# Altium PCB PCB1.PcbDoc (part 1 of 2)
Units mm, origin at the board's own origin, x right, y up, seen from the top; angles counter-clockwise.
Board outline 152.4 x 101.6 mm, 4 copper layers (Top Layer, Int1 (GND), Int2 (PWR), Bottom Layer), stack 7.251 mm thick; 107 components, 80 nets, 514 pads, 20 vias.
Unrouted connection lines stored in the file: 263.
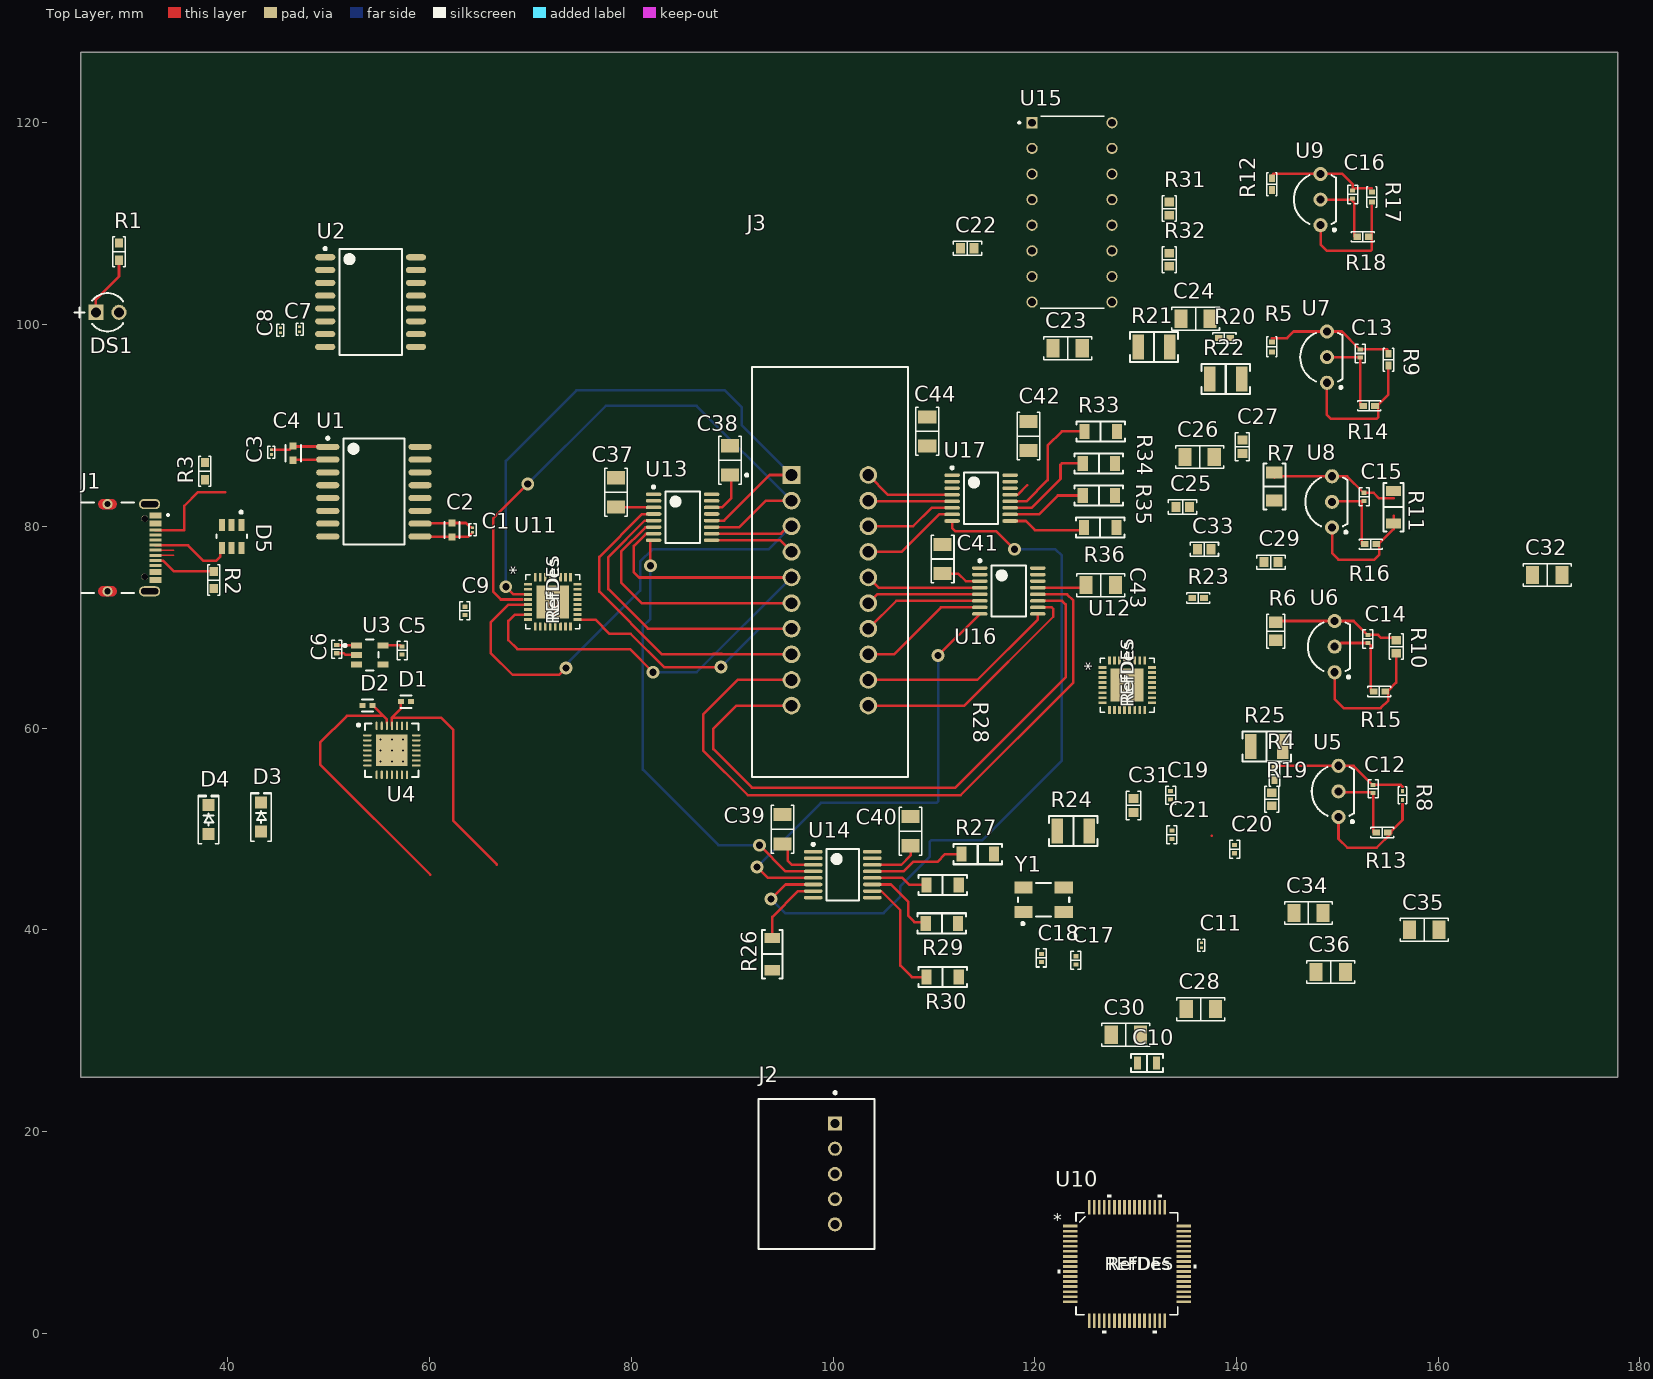
[diagram p0: Top Layer view]
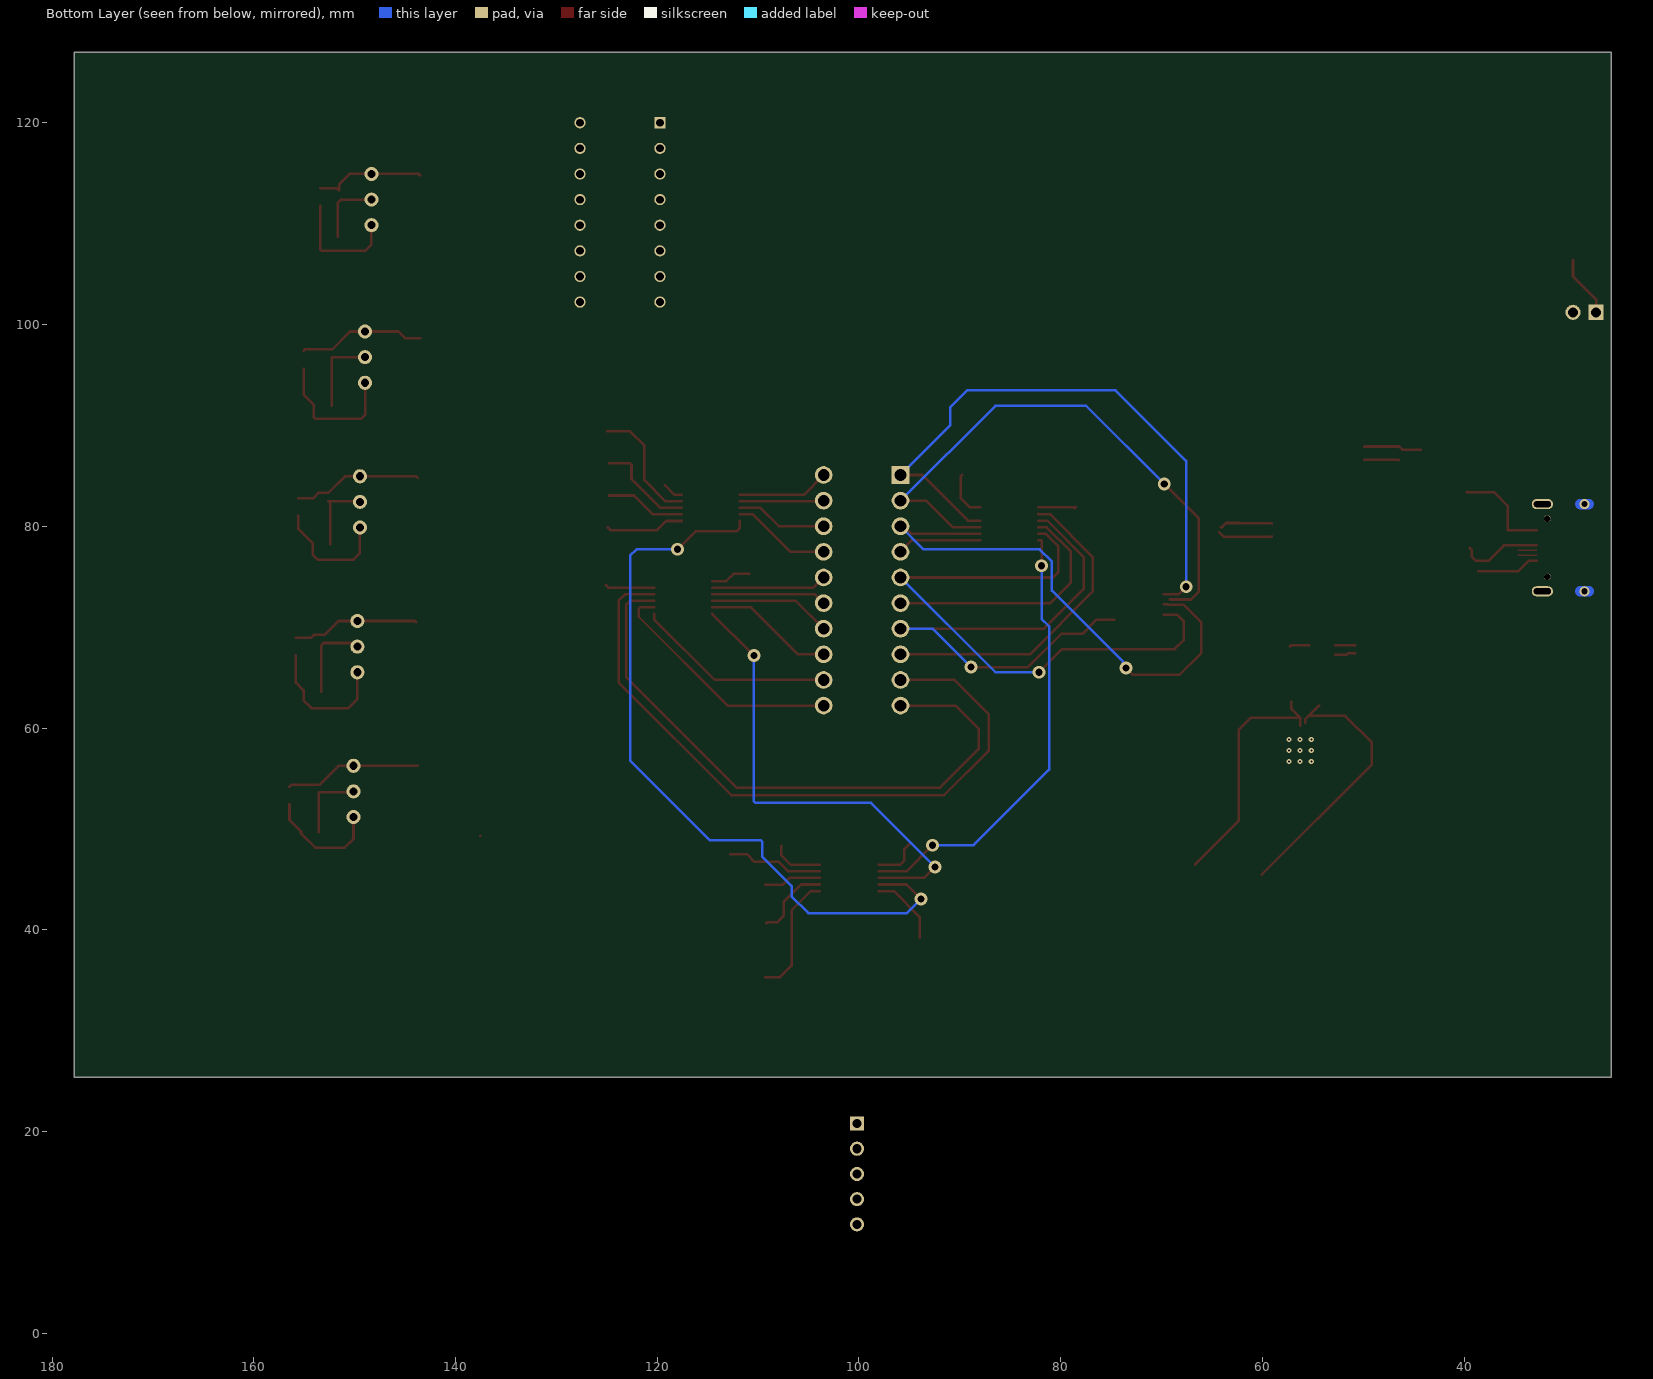
[diagram p1: Bottom Layer view, seen from below]
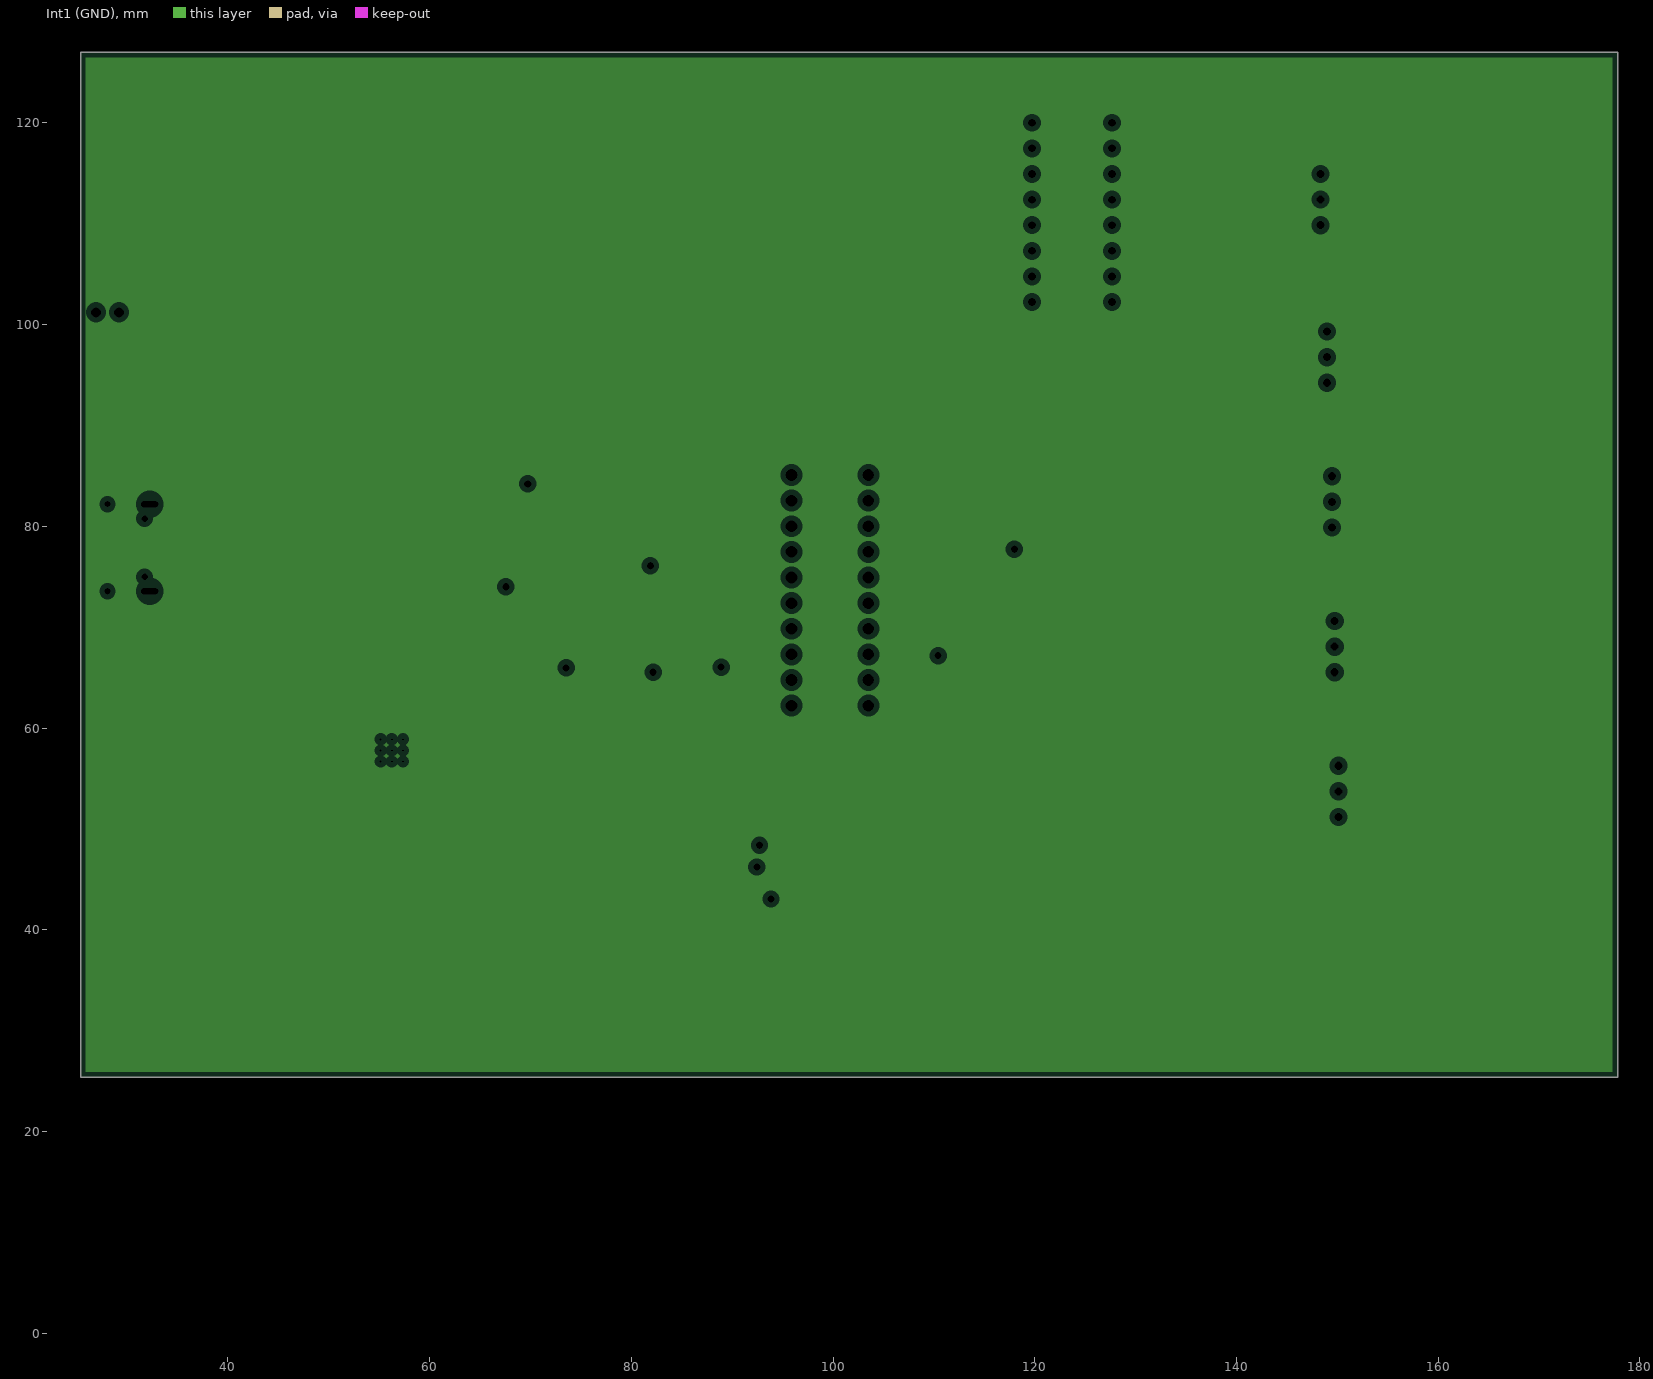
[diagram p2: Int1 (GND), clearances drawn from the general rule]
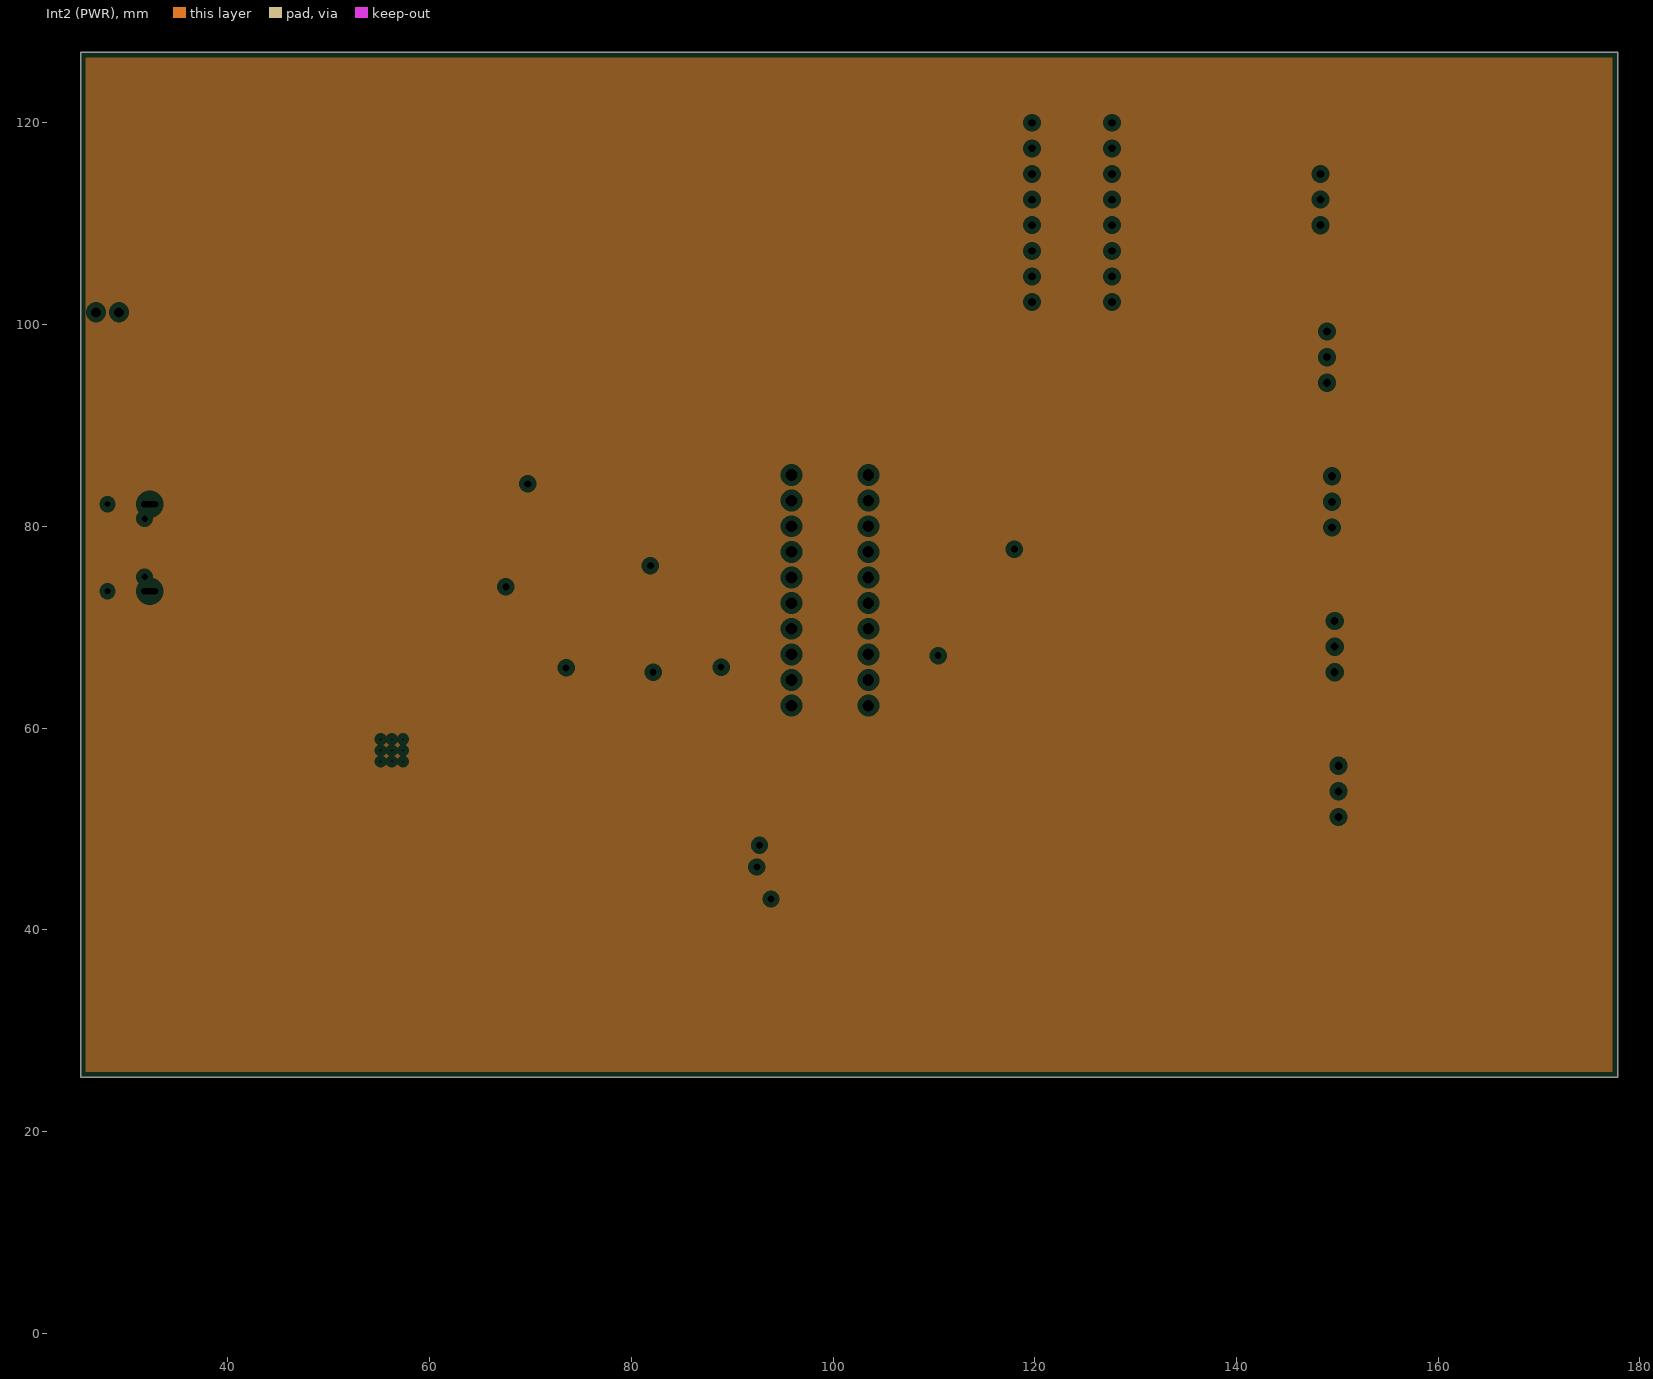
[diagram p3: Int2 (PWR), clearances drawn from the general rule]

## Layer stack, top to bottom
Top Solder: solder mask 0.0254, SM-001, Dk 4
Top Layer: signal copper 0.035
Dielectric 1: prepreg 1.6, PP-017, Dk 4.6
Dielectric 2: prepreg 1.6, PP-017, Dk 4.6
Int1 (GND): plane copper 0.035
Dielectric 3: core 0.7112, Core-039, Dk 4.8
Int2 (PWR): plane copper 0.035
Dielectric 4: prepreg 1.6, PP-017, Dk 4.6
Dielectric 5: prepreg 1.6, PP-017, Dk 4.6
Bottom Layer: signal copper 0.035
Bottom Solder: solder mask 0.0254, SM-001, Dk 4

## Board outline
25.4,25.4 177.8,25.4 177.8,127 25.4,127

## Design rules (kind name [scope] priority, off if disabled: settings)
Clearance [All] p1: gap=0.25 ignorepadtopadclearanceinfootprint=FALSE except(0: Arc-Hole Track-Hole SMDPad-Hole THPad-Hole Via-Hole Fill-Hole Poly-Hole Region-Hole Text-Hole; 0.15: Arc-Arc Arc-Track Arc-SMDPad Track-Track Track-SMDPad SMDPad-SMDPad; 0.3: Arc-THPad Track-THPad SMDPad-THPad THPad-THPad)
PlaneClearance [All] p1: clearance=0.508
PlaneConnect [All] p1: planeconnectstyle=Relief reliefexpansion=0.508 reliefentries=4 reliefconductorwidth=0.254 reliefairgap=0.254
PolygonConnect [All] p1: thpad.connectstyle=Relief thpad.reliefconductorwidth=0.254 thpad.reliefentries=4 thpad.polygonreliefangle="90 Angle" thpad.airgapwidth=0.254 smdpad.connectstyle=Relief smdpad.reliefconductorwidth=0.254 smdpad.reliefentries=4 smdpad.polygonreliefangle="90 Angle" smdpad.airgapwidth=0.254 via.connectstyle=Direct via.reliefconductorwidth=0.254 via.reliefentries=4 via.polygonreliefangle="90 Angle" via.airgapwidth=0.254
RoutingVias [All] p1: holewidth=0.3 width=0.7 viastyle="Through Hole" minholewidth=0.25 minwidth=0.6 maxholewidth=0.3 maxwidth=0.7
SolderMaskExpansion [All] p1: expansion=0.102 istentingtop=FALSE
SupplyNets "Schematic Supply Nets_2" [InNet('2Y5')] p1: voltage=0.000
SupplyNets "Schematic Supply Nets_5" [InNet('REFN')] p2: voltage=0.000
SupplyNets "Schematic Supply Nets_4" [InNet('VBUS')] p3: voltage=0.000
SupplyNets "Schematic Supply Nets_3" [InNet('VDD')] p4: voltage=0.000
SupplyNets "Schematic Supply Nets_1" [InNet('USBGND')] p5: voltage=0.000
UnRoutedNet [All] p1: checkbadconnections=TRUE
Width [All] p1: maxlimit=1 minlimit=0.15 preferedwidth=0.3
27 further rules are at their usual default settings.

## Classes and differential pairs
component class USB_to_UART: C1 C2 C3 C4 C5 C6 C7 C8 C9 C10 C11 D1 D2 D3 D4 D5 DS1 J1 R1 R2 R3 U1 U2 U3 U4
component class STM32: C12 C13 C14 C15 C16 C17 C18 C19 C20 C21 J2 R4 R5 R6 R7 R8 R9 R10 R11 R12 R13 R14 R15 R16 R17 R18 R19 U5 U6 U7 U8 U9 U10 Y1
component class Muxes_and_ADC: C34 C35 C36 C37 C38 C39 C40 C41 C42 C43 C44 R26 R27 R28 R29 R30 R31 R32 R33 R34 R35 R36 U13 U14 U15 U16 U17
component class "Analog_Switch_Array_and_ZIF_ socket": C22 C23 C24 C25 C26 C27 C28 C29 C30 C31 C32 C33 J3 R20 R21 R22 R23 R24 R25 U11 U12

## Components (designator, comment, footprint, x,y, rotation, side; value= is the part's Value field where it differs from the comment)
C1 "GRM033R61A104ME15D" "MURATA GRM033 0201_0603" 64.262,79.645 r90 top value=100nF
C2 "10uF" FP-C1608-080-0_1-MFG 62.23,79.629 r90 top
C3 "GRM033R61A104ME15D" "MURATA GRM033 0201_0603" 44.323,87.36 r90 top value=100nF
C4 "10uF" FP-C1608-080-0_1-MFG 46.482,87.249 r90 top
C5 "GRM155C81C105ME11J" "MURATA GRM155 0402_1005" 57.277,67.691 r90 top value=2.2µF
C6 "GRM155C81C105ME11J" "MURATA GRM155 0402_1005" 50.8,67.818 r90 top value=2.2µF
C7 "GRM033R61A104ME15D" "MURATA GRM033 0201_0603" 47.117,99.552 r90 top value=100nF
C8 "GRM033R61A104ME15D" "MURATA GRM033 0201_0603" 45.212,99.441 r90 top value=100nF
C9 "GRM155C81C105ME11J" "MURATA GRM155 0402_1005" 63.5,71.628 r90 top value=10nF
C10 "GRM21BR71A475KE51L" "MURATA GRM21B 0805_2012" 131.125,26.797 r0 top value=4.7µF
C11 "GRM033R61A104ME15D" "MURATA GRM033 0201_0603" 136.525,38.465 r90 top value=100nF
C12 "GRM155R71H104KE14D" "MURATA GRM155 0402_1005" 153.543,53.975 r90 top value=0.1uF
C13 "GRM155R71H104KE14D" "MURATA GRM155 0402_1005" 152.273,97.136 r90 top value=0.1uF
C14 "GRM155R71H104KE14D" "MURATA GRM155 0402_1005" 153.035,68.834 r90 top value=0.1uF
C15 "GRM155R71H104KE14D" "MURATA GRM155 0402_1005" 152.654,82.931 r90 top value=0.1uF
C16 "GRM155R71H104KE14D" "MURATA GRM155 0402_1005" 151.511,112.903 r90 top value=0.1uF
C17 "GRM155R71H104KE14D" "MURATA GRM155 0402_1005" 124.079,36.976 r90 top value=15pF
C18 "GRM155R71H104KE14D" "MURATA GRM155 0402_1005" 120.65,37.211 r90 top value=15pF
C19 "GRM155R71H104KE14D" "MURATA GRM155 0402_1005" 133.477,53.34 r90 top value=100nF
C20 "GRM155R71H104KE14D" "MURATA GRM155 0402_1005" 139.827,47.987 r90 top value=100nF
C21 "GRM155R71H104KE14D" "MURATA GRM155 0402_1005" 133.604,49.422 r90 top value=100nF
C22 "KGM15CR51A106MM" "CAP 0603_1608" 113.324,107.569 r180 top value=10µF
C23 "C1206X104G4HAC7800" "CAP 1206_3216 - 0.8MM" 123.264,97.663 r0 top value=100nF
C24 "C1206X104G4HAC7800" "CAP 1206_3216 - 0.8MM" 135.943,100.584 r0 top value=100nF
C25 "KGM15CR51A106MM" "CAP 0603_1608" 134.66,81.915 r0 top value=10µF
C26 "C1206X104G4HAC7800" "CAP 1206_3216 - 0.8MM" 136.345,86.868 r0 top value=100nF
C27 "KGM15CR51A106MM" "CAP 0603_1608" 140.589,87.884 r90 top value=10µF
C28 "C1206X104G4HAC7800" "CAP 1206_3216 - 0.8MM" 136.472,32.131 r0 top value=100nF
C29 "KGM15CR51A106MM" "CAP 0603_1608" 143.423,76.454 r180 top value=10µF
C30 "C1206X104G4HAC7800" "CAP 1206_3216 - 0.8MM" 129.032,29.591 r0 top value=100nF
C31 "KGM15CR51A106MM" "CAP 0603_1608" 129.794,52.324 r90 top value=10µF
C32 "C1206X104G4HAC7800" "CAP 1206_3216 - 0.8MM" 170.815,75.184 r0 top value=100nF
C33 "KGM15CR51A106MM" "CAP 0603_1608" 136.819,77.724 r180 top value=10µF
C34 "C1206X104G4HAC7800" "CAP 1206_3216 - 0.8MM" 147.14,41.656 r0 top value=100nF
C35 "C1206X104G4HAC7800" "CAP 1206_3216 - 0.8MM" 158.623,40.005 r0 top value=1uF
C36 "C1206X104G4HAC7800" "CAP 1206_3216 - 0.8MM" 149.352,35.814 r0 top value=100nF
C37 "C1206X104G4HAC7800" "CAP 1206_3216 - 0.8MM" 78.486,83.365 r270 top value=100nF
C38 "C1206X104G4HAC7800" "CAP 1206_3216 - 0.8MM" 89.789,86.54 r90 top value=100nF
C39 "C1206X104G4HAC7800" "CAP 1206_3216 - 0.8MM" 94.996,49.964 r270 top value=100nF
C40 "C1206X104G4HAC7800" "CAP 1206_3216 - 0.8MM" 107.696,49.784 r90 top value=100nF
C41 "C1206X104G4HAC7800" "CAP 1206_3216 - 0.8MM" 110.871,76.761 r270 top value=100nF
C42 "C1206X104G4HAC7800" "CAP 1206_3216 - 0.8MM" 119.38,88.953 r90 top value=100nF
C43 "C1206X104G4HAC7800" "CAP 1206_3216 - 0.8MM" 126.545,74.168 r0 top value=100nF
C44 "C1206X104G4HAC7800" "CAP 1206_3216 - 0.8MM" 109.347,89.408 r90 top value=100nF
D1 "TPD1E10B06DPYR" FP-DPY0002A-MFG 57.65,62.611 r180 top
D2 "TPD1E10B06DPYR" FP-DPY0002A-MFG 53.856,62.23 r0 top
D3 "SMF5.0A" SOD123F 43.307,51.181 r90 top
D4 "SMF5.0A" SOD123F 38.1,50.927 r90 top
D5 "USBLC6-4SC6" FP-SOT23-6L-MFG 40.386,79.001 r270 top value=3pF
DS1 "304090040" LED-2P-2.28-3MM 28.067,101.219 r0 top
J1 "USB4105GFA060" GCT_USB4105GFA060 28.07,77.882 r270 top
J2 "S5B-XH-A-1(LF)(SN)" FP-S5B-XH-A-1_LF_SN-MFG 98.353,15.795 r90 top
J3 "220-3342-00-0602J" FP-220-3342-00-0602J-0 99.695,75.45 r90 top
R1 "RC0603JR-105K1L" "YAGEO RES 0603_1608" 29.21,107.227 r90 top value="1 kOhms"
R2 "RC0603JR-105K1L" "YAGEO RES 0603_1608" 38.608,74.676 r90 top value="5.1 kOhms"
R3 "RC0603JR-105K1L" "YAGEO RES 0603_1608" 37.719,85.471 r270 top value="5.1 kOhms"
R4 "CRCW04022K49FKEDC" "RES 0402_1005" 143.764,55.386 r90 top value="2.49 kOhms"
R5 "RC0402FR-07442RL" "YAGEO RES 0402_1005" 143.51,97.79 r90 top value="442 Ohms"
R6 "RMEF0805FT200R" "RES 0805_2012" 143.891,69.596 r90 top value="920 Ohms"
R7 "RQ73C2B1K69BTD" "RES 1206_3216" 143.764,83.947 r90 top
R8 "RN73R1ETTP4171F50" "KOA RES RK73 RN73 0402_1005" 156.464,53.326 r90 top value="4.17 kOhms"
R9 "TNPW04025K56BEED" "RES 0402_1005" 155.067,96.52 r90 top value="5.56 kOhms"
R10 "RNCF0603BTE6K57" "RES 0603_1608" 155.829,68.072 r90 top value="6.57 kOhms"
R11 "RT1206BRD072K55L" "YAGEO RES 1206_3216" 155.575,81.901 r90 top
R12 "CRCW04022K49FKEDC" "RES 0402_1005" 143.51,113.919 r90 top value="2.49 kOhms"
R13 "CRCW04022K49FKEDC" "RES 0402_1005" 154.446,49.657 r0 top value="2.49 kOhms"
R14 "CRCW04022K49FKEDC" "RES 0402_1005" 153.162,91.948 r0 top value="2.49 kOhms"
R15 "CRCW04022K49FKEDC" "RES 0402_1005" 154.178,63.627 r0 top value="2.49 kOhms"
R16 "CRCW04022K49FKEDC" "RES 0402_1005" 153.303,78.232 r0 top value="2.49 kOhms"
R17 "AF0402FR-071K13L" "YAGEO RES 0402_1005" 153.416,112.649 r90 top value="1.13 kOhms"
R18 "CRCW04022K49FKEDC" "RES 0402_1005" 152.541,108.712 r0 top value="2.49 kOhms"
R19 "PNM0603E5001BST5" "RES 0603_1608" 143.51,52.944 r90 top value="5 kOhms"
R20 "RP73PF1E10KBTDF" "RES 0402_1005" 138.811,98.679 r180 top value="10 kOhms"
R21 "SG732ETTD222K" "RES 1210_3225" 131.826,97.79 r0 top
R22 "SG732ETTD222K" "RES 1210_3225" 138.938,94.615 r0 top
R23 "RP73PF1E10KBTDF" "RES 0402_1005" 136.204,72.898 r180 top value="10 kOhms"
R24 "SG732ETTD222K" "RES 1210_3225" 123.825,49.784 r0 top
R25 "SG732ETTD222K" "RES 1210_3225" 143.002,58.166 r0 top
R26 "RC1206FR-0747KP" "YAGEO RES 1206_3216" 93.98,37.592 r90 top
R27 "RC1206FR-0747KP" "YAGEO RES 1206_3216" 114.351,47.498 r180 top
R28 "RC1206FR-0747KP" "YAGEO RES 1206_3216" 110.871,44.45 r180 top
R29 "RC1206FR-0747KP" "YAGEO RES 1206_3216" 110.795,40.64 r180 top
R30 "RC1206FR-0747KP" "YAGEO RES 1206_3216" 110.871,35.306 r180 top
R31 "KTR03EZPF4701" "RES 0603_1608" 133.35,111.506 r90 top value="4.7 kOhms"
R32 "KTR03EZPF4701" "RES 0603_1608" 133.35,106.426 r90 top value="4.7 kOhms"
R33 "RC1206FR-0747KP" "YAGEO RES 1206_3216" 126.543,89.408 r180 top
R34 "RC1206FR-0747KP" "YAGEO RES 1206_3216" 126.365,86.233 r180 top
R35 "RC1206FR-0747KP" "YAGEO RES 1206_3216" 126.365,83.058 r180 top
R36 "RC1206FR-0747KP" "YAGEO RES 1206_3216" 126.492,79.883 r180 top
U1 "ADUM5000ARWZ" ADI-RW-16_N 54.483,83.439 r0 top
U2 "ADUM4160BRWZ" RW-16_L 54.157,102.235 r0 top
U3 "TPS7A2033PDBVR" FP-DBV0005A-MFG 54.072,67.249 r0 top
U4 "CP2102-GM" SLAB-QFN-28-3125x3125TP_N 56.261,57.785 r0 top
U5 "TLV431CLPE3" TI-LP3 150.114,53.721 r0 top
U6 "TLV431CLPE3" TI-LP3 149.733,68.072 r0 top
U7 "TLV431CLPE3" TI-LP3 148.971,96.774 r0 top
U8 "TLV431CLPE3" TI-LP3 149.479,82.423 r0 top
U9 "TLV431CLPE3" TI-LP3 148.336,112.395 r0 top
U10 "STM32C071RBT6" LQFP-64_STM 129.147,6.871 r0 top
U11 "ADG2128BCPZ-REEL7" CP_32_7_ADI 72.224,72.505 r90 top
U12 "ADG2128BCPZ-REEL7" CP_32_7_ADI 129.159,64.262 r90 top
U13 "ADG708BRUZ-REEL" ADI-RU-16_N 85.09,80.899 r0 top
U14 "ADG709BRUZ-REEL" ADI-RU-16_M 100.965,45.466 r0 top
U15 "NAU7802KGI" DIP792W45P254L1904H533Q16 123.698,111.125 r0 top
U16 "ADG708BRUZ-REEL" ADI-RU-16_N 117.429,73.589 r0 top
U17 "ADG708BRUZ-REEL" ADI-RU-16_N 114.681,82.804 r0 top
Y1 "ABM3B-24.000MHZ-10-1-U-T" FP-ABM3B-MFG 120.872,42.983 r0 top

## Footprints (in the part's own frame and the unit in brackets; to place one, negate y for a bottom-side part, rotate by r counter-clockwise, add the part's x,y. Pads: shape width x height; smd on the part's side, far side on the other; paste and mask are expansions set on the pad)
ADI-RU-16_M [mm] "SOP, 16-Leads, Body 5x4.4mm, Pitch 0.65mm, IPC Low Density"
  oval 1.85x0.35 smd: 1(-2.925,2.275) 2(-2.925,1.625) 3(-2.925,0.975) 4(-2.925,0.325) 5(-2.925,-0.325) 6(-2.925,-0.975) 7(-2.925,-1.625) 8(-2.925,-2.275) 9(2.925,-2.275) 10(2.925,-1.625) 11(2.925,-0.975) 12(2.925,-0.325) 13(2.925,0.325) 14(2.925,0.975) 15(2.925,1.625) 16(2.925,2.275)
  silkscreen extent -3.05,-2.55 1.6,3.12, body extent -2.25,-2.55 2.25,2.55, height 1.2
ADI-RU-16_N [mm] "SOP, 16-Leads, Body 5x4.4mm, Pitch 0.65mm, IPC Medium Density"
  oval 1.55x0.35 smd: 1(-2.875,2.275) 2(-2.875,1.625) 3(-2.875,0.975) 4(-2.875,0.325) 5(-2.875,-0.325) 6(-2.875,-0.975) 7(-2.875,-1.625) 8(-2.875,-2.275) 9(2.875,-2.275) 10(2.875,-1.625) 11(2.875,-0.975) 12(2.875,-0.325) 13(2.875,0.325) 14(2.875,0.975) 15(2.875,1.625) 16(2.875,2.275)
  silkscreen extent -3,-2.55 1.7,3.12, body extent -2.25,-2.55 2.25,2.55, height 1.2
ADI-RW-16_N [mm] "SOIC, 16-Leads, Body 10.3x7.5mm, Pitch 1.27mm, IPC Medium Density"
  oval 2.3x0.6 smd: 1(-4.575,4.445) 2(-4.575,3.175) 3(-4.575,1.905) 4(-4.575,0.635) 5(-4.575,-0.635) 6(-4.575,-1.905) 7(-4.575,-3.175) 8(-4.575,-4.445) 9(4.575,-4.445) 10(4.575,-3.175) 11(4.575,-1.905) 12(4.575,-0.635) 13(4.575,0.635) 14(4.575,1.905) 15(4.575,3.175) 16(4.575,4.445)
  silkscreen extent -4.7,-5.25 3.03,5.42, body extent -3.8,-5.25 3.8,5.25, height 2.65
"CAP 0603_1608" [mm] "Chip Capacitor, 2-Leads, Body 1.60x0.80mm, IPC Medium Density"
  rect 0.9x1 smd: 1(-0.675,0) 2(0.675,0)
  silkscreen extent -1.4,-0.7 1.4,0.7, body extent -0.8,-0.41 0.8,0.41, height 0.82
"CAP 1206_3216 - 0.8MM" [mm] "Chip Capacitor, 2-Leads, Body 3.25x1.60mm, IPC Medium Density"
  rect 1.3x1.8 smd: 1(-1.45,0) 2(1.45,0)
  silkscreen extent -2.37,-1.12 2.37,1.12, body extent -1.6,-0.8 1.6,0.8, height 0.8
CP_32_7_ADI [mm]
  rect 0.275x0.805 smd paste+0 mask+0: 1(1.75,2.452) 2(1.25,2.452) 3(0.75,2.452) 4(0.25,2.452) 5(-0.25,2.452) 6(-0.75,2.452) 7(-1.25,2.452) 8(-1.75,2.452) 17(-1.75,-2.452) 18(-1.25,-2.452) 19(-0.75,-2.452) 20(-0.25,-2.452) 21(0.25,-2.452) 22(0.75,-2.452) 23(1.25,-2.452) 24(1.75,-2.452)
  rect 0.805x0.275 smd paste+0 mask+0: 9(-2.452,1.75) 10(-2.452,1.25) 11(-2.452,0.75) 12(-2.452,0.25) 13(-2.452,-0.25) 14(-2.452,-0.75) 15(-2.452,-1.25) 16(-2.452,-1.75) 25(2.452,-1.75) 26(2.452,-1.25) 27(2.452,-0.75) 28(2.452,-0.25) 29(2.452,0.25) 30(2.452,0.75) 31(2.452,1.25) 32(2.452,1.75)
  rect 3.25x3.25 smd paste+0 mask+0: HTAB(0,0)
  silkscreen extent -2.68,-2.68 2.68,2.68, body extent -2.55,-2.55 2.55,2.55, height 0.8
DIP792W45P254L1904H533Q16 [mm]
  rect 1.11x1.11 / inner round 1.11 / far side rect 1.11x1.11 hole 0.76 mask+0.102: 1(-3.962,8.89)
  round 1.11 hole 0.76 mask+0.102: 2(-3.962,6.35) 3(-3.962,3.81) 4(-3.962,1.27) 5(-3.962,-1.27) 6(-3.962,-3.81) 7(-3.962,-6.35) 8(-3.962,-8.89) 9(3.962,-8.89) 10(3.962,-6.35) 11(3.962,-3.81) 12(3.962,-1.27) 13(3.962,1.27) 14(3.962,3.81) 15(3.962,6.35) 16(3.962,8.89)
  silkscreen extent -5.33,-9.52 3.17,9.52, body extent -4.13,-9.52 4.13,9.52, height 5.33
FP-220-3342-00-0602J-0 [mm]
  rect 1.75x1.75 hole 1.15 paste-2539.97 mask+0: 1(9.64,3.81)
  round 1.75 hole 1.15 paste-2539.97 mask+0: 2(7.1,3.81) 3(4.56,3.81) 4(2.02,3.81) 5(-0.52,3.81) 6(-3.06,3.81) 7(-5.6,3.81) 8(-8.14,3.81) 9(-10.68,3.81) 10(-13.22,3.81) 11(-13.22,-3.81) 12(-10.68,-3.81) 13(-8.14,-3.81) 14(-5.6,-3.81) 15(-3.06,-3.81) 16(-0.52,-3.81) 17(2.02,-3.81) 18(4.56,-3.81) 19(7.1,-3.81) 20(9.64,-3.81)
  silkscreen extent -20.33,-7.73 20.33,8.37, body extent -20.43,-7.83 32.97,7.83, height 0.25
FP-ABM3B-MFG [mm]
  rect 1.8x1.2 smd paste+0 mask+0: 1(-2,-1.2) 2(2,-1.2) 3(2,1.2) 4(-2,1.2)
  silkscreen extent -2.55,-2.5 2.55,1.65, body extent -3,-1.9 3,1.9, height 0.25
FP-C1608-080-0_1-MFG [mm]
  rect 0.7x0.7 smd paste+0 mask+0: 1(-0.7,0) 2(0.7,0)
  silkscreen extent -0.8,-0.75 0.8,0.75, body extent -1.15,-0.55 1.15,0.55, height 0.25
FP-DBV0005A-MFG [mm]
  rrect17% 1.1x0.6 smd paste+0 mask+0: 1(-1.3,0.95) 2(-1.3,0) 3(-1.3,-0.95) 4(1.3,-0.95) 5(1.3,0.95)
  silkscreen extent -2.57,-1.53 0.87,1.53, body extent -1.95,-1.78 1.95,1.78, height 0.25
FP-DPY0002A-MFG [mm]
  rect 0.6x0.5 smd paste+0 mask+0: 1(-0.5,0) 2(0.5,0)
  silkscreen extent -0.56,-0.6 0.55,0.6, body extent -0.9,-0.45 0.9,0.45, height 0.25
FP-S5B-XH-A-1_LF_SN-MFG [mm]
  rect 1.4x1.4 hole 0.9 paste-2539.97 mask+0: 1(5,-1.85)
  round 1.4 hole 0.9 paste-2539.97 mask+0: 2(2.5,-1.85) 3(0,-1.85) 4(-2.5,-1.85) 5(-5,-1.85)
  silkscreen extent -7.45,-5.75 8.17,5.75, body extent -7.55,-5.85 7.55,5.85, height 0.25
FP-SOT23-6L-MFG [mm]
  rect 1.2x0.6 smd paste+0 mask+0: 1(-1.15,0.95) 2(-1.15,0) 3(-1.15,-0.95) 4(1.15,-0.95) 5(1.15,0) 6(1.15,0.95)
  silkscreen extent -2.52,-1.53 0.18,1.53, body extent -1.85,-1.63 1.85,1.63, height 0.25
GCT_USB4105GFA060 [mm]
  rect 0.6x1.15 smd: A1_B12(-3.2,4.755) A4_B9(-2.4,4.755) B1_A12(3.2,4.755) B4_A9(2.4,4.755)
  rect 0.3x1.15 smd: A5(-1.25,4.755) A6(-0.25,4.755) A7(0.25,4.755) A8(1.25,4.755) B5(1.75,4.755) B6(0.75,4.755) B7(-0.75,4.755) B8(-1.75,4.755)
  oval 1x2.1 hole 0.6 slot 1.7 at 90 deg: SH1(-4.32,4.18) SH2(4.32,4.18)
  round 1 hole 0.6 mask+0: SH3(-4.32,0) SH4(4.32,0)
  round 0.65 hole 0.65 unplated: ""(-2.89,3.68) ""(2.89,3.68)
  Top Layer region: -4.294,0.899 -4.268,0.897 -4.242,0.894 -4.216,0.889 -4.191,0.883 -4.165,0.876 -4.141,0.867 -4.117,0.857 -4.093,0.846 -4.07,0.833 -4.048,0.819 -4.026,0.805 -4.005,0.789 -3.985,0.772 -3.966,0.754 -3.948,0.735 -3.931,0.715 -3.915,0.694 -3.901,0.672 -3.887,0.65 -3.874,0.627 -3.863,0.603 -3.853,0.579 -3.844,0.555 -3.837,0.529 -3.831,0.504 -3.826,0.478 -3.823,0.452 -3.821,0.426 -3.82,0.4 -3.82,0 -3.82,-0.4 -3.821,-0.426 -3.823,-0.452 -3.826,-0.478 -3.831,-0.504 -3.837,-0.529 -3.844,-0.555 -3.853,-0.579 -3.863,-0.603 -3.874,-0.627 -3.887,-0.65 -3.901,-0.672 -3.915,-0.694 -3.931,-0.715 -3.948,-0.735 -3.966,-0.754 -3.985,-0.772 -4.005,-0.789 -4.026,-0.805 -4.048,-0.819 -4.07,-0.833 -4.093,-0.846 -4.117,-0.857 -4.141,-0.867 -4.165,-0.876 -4.191,-0.883 -4.216,-0.889 -4.242,-0.894 -4.268,-0.897 -4.294,-0.899 -4.32,-0.9 -4.346,-0.899 -4.372,-0.897 -4.398,-0.894 -4.424,-0.889 -4.449,-0.883 -4.475,-0.876 -4.499,-0.867 -4.523,-0.857 -4.547,-0.846 -4.57,-0.833 -4.592,-0.819 -4.614,-0.805 -4.635,-0.789 -4.655,-0.772 -4.674,-0.754 -4.692,-0.735 -4.709,-0.715 -4.725,-0.694 -4.739,-0.672 -4.753,-0.65 -4.766,-0.627 -4.777,-0.603 -4.787,-0.579 -4.796,-0.555 -4.803,-0.529 -4.809,-0.504 -4.814,-0.478 -4.817,-0.452 -4.819,-0.426 -4.82,-0.4 -4.82,0 -4.82,0.4 -4.819,0.426 -4.817,0.452 -4.814,0.478 -4.809,0.504 -4.803,0.529 -4.796,0.555 -4.787,0.579 -4.777,0.603 -4.766,0.627 -4.753,0.65 -4.739,0.672 -4.725,0.694 -4.709,0.715 -4.692,0.735 -4.674,0.754 -4.655,0.772 -4.635,0.789 -4.614,0.805 -4.592,0.819 -4.57,0.833 -4.547,0.846 -4.523,0.857 -4.499,0.867 -4.475,0.876 -4.449,0.883 -4.424,0.889 -4.398,0.894 -4.372,0.897 -4.346,0.899 -4.32,0.9
  Top Layer region: 4.346,0.899 4.372,0.897 4.398,0.894 4.424,0.889 4.449,0.883 4.475,0.876 4.499,0.867 4.523,0.857 4.547,0.846 4.57,0.833 4.592,0.819 4.614,0.805 4.635,0.789 4.655,0.772 4.674,0.754 4.692,0.735 4.709,0.715 4.725,0.694 4.739,0.672 4.753,0.65 4.766,0.627 4.777,0.603 4.787,0.579 4.796,0.555 4.803,0.529 4.809,0.504 4.814,0.478 4.817,0.452 4.819,0.426 4.82,0.4 4.82,0 4.82,-0.4 4.819,-0.426 4.817,-0.452 4.814,-0.478 4.809,-0.504 4.803,-0.529 4.796,-0.555 4.787,-0.579 4.777,-0.603 4.766,-0.627 4.753,-0.65 4.739,-0.672 4.725,-0.694 4.709,-0.715 4.692,-0.735 4.674,-0.754 4.655,-0.772 4.635,-0.789 4.614,-0.805 4.592,-0.819 4.57,-0.833 4.547,-0.846 4.523,-0.857 4.499,-0.867 4.475,-0.876 4.449,-0.883 4.424,-0.889 4.398,-0.894 4.372,-0.897 4.346,-0.899 4.32,-0.9 4.294,-0.899 4.268,-0.897 4.242,-0.894 4.216,-0.889 4.191,-0.883 4.165,-0.876 4.141,-0.867 4.117,-0.857 4.093,-0.846 4.07,-0.833 4.048,-0.819 4.026,-0.805 4.005,-0.789 3.985,-0.772 3.966,-0.754 3.948,-0.735 3.931,-0.715 3.915,-0.694 3.901,-0.672 3.887,-0.65 3.874,-0.627 3.863,-0.603 3.853,-0.579 3.844,-0.555 3.837,-0.529 3.831,-0.504 3.826,-0.478 3.823,-0.452 3.821,-0.426 3.82,-0.4 3.82,0 3.82,0.4 3.821,0.426 3.823,0.452 3.826,0.478 3.831,0.504 3.837,0.529 3.844,0.555 3.853,0.579 3.863,0.603 3.874,0.627 3.887,0.65 3.901,0.672 3.915,0.694 3.931,0.715 3.948,0.735 3.966,0.754 3.985,0.772 4.005,0.789 4.026,0.805 4.048,0.819 4.07,0.833 4.093,0.846 4.117,0.857 4.141,0.867 4.165,0.876 4.191,0.883 4.216,0.889 4.242,0.894 4.268,0.897 4.294,0.899 4.32,0.9
  Bottom Layer region: -4.294,0.899 -4.268,0.897 -4.242,0.894 -4.216,0.889 -4.191,0.883 -4.165,0.876 -4.141,0.867 -4.117,0.857 -4.093,0.846 -4.07,0.833 -4.048,0.819 -4.026,0.805 -4.005,0.789 -3.985,0.772 -3.966,0.754 -3.948,0.735 -3.931,0.715 -3.915,0.694 -3.901,0.672 -3.887,0.65 -3.874,0.627 -3.863,0.603 -3.853,0.579 -3.844,0.555 -3.837,0.529 -3.831,0.504 -3.826,0.478 -3.823,0.452 -3.821,0.426 -3.82,0.4 -3.82,0 -3.82,-0.4 -3.821,-0.426 -3.823,-0.452 -3.826,-0.478 -3.831,-0.504 -3.837,-0.529 -3.844,-0.555 -3.853,-0.579 -3.863,-0.603 -3.874,-0.627 -3.887,-0.65 -3.901,-0.672 -3.915,-0.694 -3.931,-0.715 -3.948,-0.735 -3.966,-0.754 -3.985,-0.772 -4.005,-0.789 -4.026,-0.805 -4.048,-0.819 -4.07,-0.833 -4.093,-0.846 -4.117,-0.857 -4.141,-0.867 -4.165,-0.876 -4.191,-0.883 -4.216,-0.889 -4.242,-0.894 -4.268,-0.897 -4.294,-0.899 -4.32,-0.9 -4.346,-0.899 -4.372,-0.897 -4.398,-0.894 -4.424,-0.889 -4.449,-0.883 -4.475,-0.876 -4.499,-0.867 -4.523,-0.857 -4.547,-0.846 -4.57,-0.833 -4.592,-0.819 -4.614,-0.805 -4.635,-0.789 -4.655,-0.772 -4.674,-0.754 -4.692,-0.735 -4.709,-0.715 -4.725,-0.694 -4.739,-0.672 -4.753,-0.65 -4.766,-0.627 -4.777,-0.603 -4.787,-0.579 -4.796,-0.555 -4.803,-0.529 -4.809,-0.504 -4.814,-0.478 -4.817,-0.452 -4.819,-0.426 -4.82,-0.4 -4.82,0 -4.82,0.4 -4.819,0.426 -4.817,0.452 -4.814,0.478 -4.809,0.504 -4.803,0.529 -4.796,0.555 -4.787,0.579 -4.777,0.603 -4.766,0.627 -4.753,0.65 -4.739,0.672 -4.725,0.694 -4.709,0.715 -4.692,0.735 -4.674,0.754 -4.655,0.772 -4.635,0.789 -4.614,0.805 -4.592,0.819 -4.57,0.833 -4.547,0.846 -4.523,0.857 -4.499,0.867 -4.475,0.876 -4.449,0.883 -4.424,0.889 -4.398,0.894 -4.372,0.897 -4.346,0.899 -4.32,0.9
  Bottom Layer region: 4.346,0.899 4.372,0.897 4.398,0.894 4.424,0.889 4.449,0.883 4.475,0.876 4.499,0.867 4.523,0.857 4.547,0.846 4.57,0.833 4.592,0.819 4.614,0.805 4.635,0.789 4.655,0.772 4.674,0.754 4.692,0.735 4.709,0.715 4.725,0.694 4.739,0.672 4.753,0.65 4.766,0.627 4.777,0.603 4.787,0.579 4.796,0.555 4.803,0.529 4.809,0.504 4.814,0.478 4.817,0.452 4.819,0.426 4.82,0.4 4.82,0 4.82,-0.4 4.819,-0.426 4.817,-0.452 4.814,-0.478 4.809,-0.504 4.803,-0.529 4.796,-0.555 4.787,-0.579 4.777,-0.603 4.766,-0.627 4.753,-0.65 4.739,-0.672 4.725,-0.694 4.709,-0.715 4.692,-0.735 4.674,-0.754 4.655,-0.772 4.635,-0.789 4.614,-0.805 4.592,-0.819 4.57,-0.833 4.547,-0.846 4.523,-0.857 4.499,-0.867 4.475,-0.876 4.449,-0.883 4.424,-0.889 4.398,-0.894 4.372,-0.897 4.346,-0.899 4.32,-0.9 4.294,-0.899 4.268,-0.897 4.242,-0.894 4.216,-0.889 4.191,-0.883 4.165,-0.876 4.141,-0.867 4.117,-0.857 4.093,-0.846 4.07,-0.833 4.048,-0.819 4.026,-0.805 4.005,-0.789 3.985,-0.772 3.966,-0.754 3.948,-0.735 3.931,-0.715 3.915,-0.694 3.901,-0.672 3.887,-0.65 3.874,-0.627 3.863,-0.603 3.853,-0.579 3.844,-0.555 3.837,-0.529 3.831,-0.504 3.826,-0.478 3.823,-0.452 3.821,-0.426 3.82,-0.4 3.82,0 3.82,0.4 3.821,0.426 3.823,0.452 3.826,0.478 3.831,0.504 3.837,0.529 3.844,0.555 3.853,0.579 3.863,0.603 3.874,0.627 3.887,0.65 3.901,0.672 3.915,0.694 3.931,0.715 3.948,0.735 3.966,0.754 3.985,0.772 4.005,0.789 4.026,0.805 4.048,0.819 4.07,0.833 4.093,0.846 4.117,0.857 4.141,0.867 4.165,0.876 4.191,0.883 4.216,0.889 4.242,0.894 4.268,0.897 4.294,0.899 4.32,0.9
  silkscreen extent -4.47,-2.6 4.47,6.1, body extent -4.47,-2.6 4.47,5.11, height 3.31
"KOA RES RK73 RN73 0402_1005" [mm] "Chip Resistor, 2-Leads, Body 1.0x0.5mm"
  rect 0.4x0.3 smd: 1(-0.45,0) 2(0.45,0)
  silkscreen extent -0.85,-0.41 0.85,0.41, body extent -0.5,-0.25 0.5,0.25, height 0.35
LED-2P-2.28-3MM [mm] "LED, 2-Leads, Dia 3mm, Pitch 2.28mm"
  rect 1.5x1.5 hole 1: 1(-1.14,0)
  round 1.5 hole 1: 2(1.14,0)
  silkscreen extent -3.29,-1.9 1.52,1.9, body extent -1.9,-1.91 1.52,1.91, height 5.3
LQFP-64_STM [mil]
  rect 58x11 smd paste-29 mask-29: 1(-221.5,147.64) 2(-221.5,127.95) 3(-221.5,108.27) 4(-221.5,88.58) 5(-221.5,68.9) 6(-221.5,49.21) 7(-221.5,29.53) 8(-221.5,9.84) 9(-221.5,-9.84) 10(-221.5,-29.53) 11(-221.5,-49.21) 12(-221.5,-68.9) 13(-221.5,-88.58) 14(-221.5,-108.27) 15(-221.5,-127.95) 16(-221.5,-147.64) 33(221.5,-147.64) 34(221.5,-127.95) 35(221.5,-108.27) 36(221.5,-88.58) 37(221.5,-68.9) 38(221.5,-49.21) 39(221.5,-29.53) 40(221.5,-9.84) 41(221.5,9.84) 42(221.5,29.53) 43(221.5,49.21) 44(221.5,68.9) 45(221.5,88.58) 46(221.5,108.27) 47(221.5,127.95) 48(221.5,147.64)
  rect 11x58 smd paste-29 mask-29: 17(-147.64,-221.5) 18(-127.95,-221.5) 19(-108.27,-221.5) 20(-88.58,-221.5) 21(-68.9,-221.5) 22(-49.21,-221.5) 23(-29.53,-221.5) 24(-9.84,-221.5) 25(9.84,-221.5) 26(29.53,-221.5) 27(49.21,-221.5) 28(68.9,-221.5) 29(88.58,-221.5) 30(108.27,-221.5) 31(127.95,-221.5) 32(147.64,-221.5) 49(147.64,221.5) 50(127.95,221.5) 51(108.27,221.5) 52(88.58,221.5) 53(68.9,221.5) 54(49.21,221.5) 55(29.53,221.5) 56(9.84,221.5) 57(-9.84,221.5) 58(-29.53,221.5) 59(-49.21,221.5) 60(-68.9,221.5) 61(-88.58,221.5) 62(-108.27,221.5) 63(-127.95,221.5) 64(-147.64,221.5)
  silkscreen extent -270,-270 270,270, body extent -236,-236 236,236, height 63
"MURATA GRM21B 0805_2012" [mm] "Chip Capacitor, 2-Leads, Body 2.00x1.25mm"
  rect 0.7x1.3 smd: 1(-0.95,0) 2(0.95,0)
  silkscreen extent -1.58,-0.9 1.58,0.9, body extent -1,-0.63 1,0.63, height 1.25
"MURATA GRM033 0201_0603" [mm] "Chip Capacitor, 2-Leads, Body 0.60x0.30mm"
  rect 0.25x0.3 smd: 1(-0.238,0) 2(0.238,0)
  silkscreen extent -0.6,-0.35 0.6,0.35, body extent -0.31,-0.16 0.32,0.17, height 0.33
"MURATA GRM155 0402_1005" [mm] "Chip Capacitor, 2-Leads, Body 1.0x0.50mm"
  rect 0.4x0.5 smd: 1(-0.4,0) 2(0.4,0)
  silkscreen extent -0.9,-0.5 0.9,0.5, body extent -0.52,-0.27 0.53,0.28, height 0.55
"RES 0402_1005" [mm] "Chip Resistor, 2-Leads, Body 1.0x0.5mm, IPC Medium Density"
  rect 0.75x0.6 smd: 1(-0.575,0) 2(0.575,0)
  silkscreen extent -1.14,-0.51 1.14,0.51, body extent -0.5,-0.25 0.5,0.25, height 0.35
"RES 0603_1608" [mm] "Chip Resistor, 2-Leads, Body 1.60x0.80mm, IPC Medium Density"
  rect 0.85x0.95 smd: 1(-0.65,0) 2(0.65,0)
  silkscreen extent -1.27,-0.7 1.27,0.7, body extent -0.8,-0.4 0.8,0.4, height 0.45
"RES 0805_2012" [mm] "Chip Resistor, 2-Leads, Body 2.00x1.25mm, IPC Medium Density"
  rect 1.15x1.35 smd: 1(-0.875,0) 2(0.875,0)
  silkscreen extent -1.7,-0.9 1.7,0.9, body extent -1,-0.62 1,0.63, height 0.6
"RES 1206_3216" [mm] "Chip Resistor, 2-Leads, Body 3.13x1.55mm, IPC Medium Density"
  rect 1.2x1.65 smd: 1(-1.4,0) 2(1.4,0)
  silkscreen extent -2.3,-1.1 2.3,1.1, body extent -1.6,-0.8 1.6,0.8, height 0.6
"RES 1210_3225" [mm] "Chip Resistor, 2-Leads, Body 3.1x2.6mm, IPC Medium Density"
  rect 1.15x2.5 smd: 1(-1.575,0) 2(1.575,0)
  silkscreen extent -2.4,-1.5 2.4,1.5, body extent -1.6,-1.25 1.6,1.25, height 0.7
RW-16_L [mm] "SOIC, 16-Leads, Body 10.3x7.5mm, Pitch 1.27mm, IPC High Density"
  oval 2x0.6 smd: 1(-4.5,4.445) 2(-4.5,3.175) 3(-4.5,1.905) 4(-4.5,0.635) 5(-4.5,-0.635) 6(-4.5,-1.905) 7(-4.5,-3.175) 8(-4.5,-4.445) 9(4.5,-4.445) 10(4.5,-3.175) 11(4.5,-1.905) 12(4.5,-0.635) 13(4.5,0.635) 14(4.5,1.905) 15(4.5,3.175) 16(4.5,4.445)
  silkscreen extent -4.62,-5.25 3.1,5.42, body extent -3.8,-5.25 3.8,5.25, height 2.65
SLAB-QFN-28-3125x3125TP_N [mm] "QFN, 28-Leads, Body 5x5mm, Pitch 0.5mm, Thermal Pad 3.13x3.13mm, IPC Medium Density"
  oval 0.85x0.2 smd: 1(-2.425,1.5) 2(-2.425,1) 3(-2.425,0.5) 4(-2.425,0) 5(-2.425,-0.5) 6(-2.425,-1) 7(-2.425,-1.5) 15(2.425,-1.5) 16(2.425,-1) 17(2.425,-0.5) 18(2.425,0) 19(2.425,0.5) 20(2.425,1) 21(2.425,1.5)
  oval 0.2x0.85 smd: 8(-1.5,-2.425) 9(-1,-2.425) 10(-0.5,-2.425) 11(0,-2.425) 12(0.5,-2.425) 13(1,-2.425) 14(1.5,-2.425) 22(1.5,2.425) 23(1,2.425) 24(0.5,2.425) 25(0,2.425) 26(-0.5,2.425) 27(-1,2.425) 28(-1.5,2.425)
  rect 3.13x3.13 smd: 29(0,0)
  silkscreen extent -3.42,-2.65 2.65,2.65, body extent -2.5,-2.5 2.5,2.5, height 1
SOD123F [mm] "SODFL, 2-Leads, Body 1.60x3.50mm, IPC Medium Density"
  rect 1.2x1.2 smd: 1(-1.43,0) 2(1.43,0)
  silkscreen extent -2.41,-1.02 2.41,1.02, body extent -1.75,-0.8 1.75,0.8, height 1.1
TI-LP3 [mm] "TO, Flat Index; 3 In-Line, Formed Axial Leads; Body Dia. 4.8mm; Leads 0.56 x 0.41 mm (max)"
  round 1.4 hole 0.8: 1(0,-2.54) 2(0,0) 3(0,2.54)
  silkscreen extent -2.65,-3.13 1.52,2.41, body extent -2.65,-2.66 1.52,2.66, height 9.33
"YAGEO RES 0402_1005" [mm] "Chip Resistor, 2-Leads, Body 1.0x0.5mm"
  rect 0.5x0.6 smd: 1(-0.5,0) 2(0.5,0)
  silkscreen extent -1,-0.51 1,0.51, body extent -0.5,-0.25 0.5,0.25, height 0.35
"YAGEO RES 0603_1608" [mm] "Chip Resistor, 2-Leads, Body 1.60x0.80mm"
  rect 0.9x0.8 smd: 1(-0.85,0) 2(0.85,0)
  silkscreen extent -1.5,-0.6 1.5,0.6, body extent -0.8,-0.4 0.8,0.4, height 0.45
"YAGEO RES 1206_3216" [mm] "Chip Resistor, 2-Leads, Body 3.13x1.55mm"
  rect 1x1.5 smd: 1(-1.6,0) 2(1.6,0)
  silkscreen extent -2.4,-1 2.4,1, body extent -1.6,-0.8 1.6,0.8, height 0.6

## Part data
C1 C3 C7 C8 C11: library part CMP-001-025213-1, "CAP CER 0.1UF 10V X5R 0201", Part Number=GRM033R61A104ME15D
C2 C4: library part CMP-2000-04979-3, "Multilayer Ceramic Capacitors 10μF ±10% 10V X5R SMD 0603", Case Code (Imperial)=0603, Case Code (Metric)=1608, Dielectric=X5R, Dielectric Material=Ceramic, Manufacturer=TDK, Max Operating Temperature=85°C, Min Operating Temperature=-55°C, Package Quantity=1, PartNumber=C1608X5R1A106K080AC, Tolerance=10%, Voltage=10V, Capacitance=10uF, Case/Package=0603, Construction=Flat, Depth=0.8mm, Height=0.8mm, Lead Free="Lead Free", Length=1.6mm, Mount="Surface Mount", Number of Pins=2, Packaging="Tape and Reel", Radiation Hardening=No, REACH SVHC="No SVHC", Resistor Type=Ceramic, RoHS Compliant=Yes, Series=C, Termination=SMD/SMT, Thickness=0.035inch, Voltage Rating=10V, Voltage Rating (DC)=10V, Weight=7.1E-05oz, Width=0.8mm
C5 C6 C9: library part CMP-001-034252-1, "CAP CER 1UF 16V X6S 0402", Part Number=GRM155C81C105ME11J
C10: library part CMP-001-052117-1, "CAP CER 4.7UF 10V X7R 0805", Part Number=GRM21BR71A475KE51L
C12 C13 C14 C15 C16 C17 C18 C19 C20 C21: library part CMP-001-031367-1, "CAP CER 0.1UF 50V X7R 0402", Part Number=GRM155R71H104KE14D
C22 C25 C27 C29 C31 C33: library part CMP-001-046966-1, "CAP CER 10UF 10V X5R 0603", Part Number=KGM15CR51A106MM
C23 C24 C26 C28 C30 C32 C34 C35 C36 C37 C38 C39 C40 C41 C42 C43 C44: library part CMP-001-063573-1, "CAP CER 1206 0.1F 16V ULTRA STAB", Part Number=C1206X104G4HAC7800
D1 D2: library part CMP-0326-00004-4, "TVS DIODE 5.5V 14V 2X1SON", Breakdown Voltage=6V, Capacitance=12pF, Case/Package=0402, Clamping Voltage=14V, Leakage Current=100nA, Manufacturer="Texas Instruments", Max Operating Temperature=125°C, Min Operating Temperature=-40°C, Package Quantity=1, Peak Pulse Current=5A, Peak Pulse Power=90W, Power Line Protection=No, Reverse Standoff Voltage=5.5V, Test Current=1mA, Composition=Zener, Contact Plating=Gold, Direction=Bidirectional, Element Configuration=Single, ESD Protection=Yes, Height=0.35mm, Interface=GPIO, Lead Free="Lead Free", Length=1.1mm, Max Reverse Leakage Current=100nA, Min Breakdown Voltage=6V, Number of Bidirectional Channels=1, Number Of Channels=1, Number of Pins=2, Packaging="Tape and Reel", PartNumber=TPD1E10B06DPYR, Radiation Hardening=No, REACH SVHC="No SVHC", Width=0.7mm, Working Voltage=5.5V
D3 D4: library part CMP-004-19987-1, "TVS SOD123FL 5V 200W UNIDIR", Part Number=SMF5.0A
D5: library part CMP-2000-07370-2, "TVS DIODE 5.25V 17V SOT23-6", Breakdown Voltage=6V, Capacitance=3pF, Clamping Voltage=17V, Manufacturer=STMicroelectronics, Max Junction Temp=+125°C, Package=SOT23-6L, Peak Pulse Power=130W, Temperature="-40°C to +125°C", Temperature Range Low=-40°C, Automotive=No, Category=Diode, ComponentLink2Description=Datasheet, ComponentLink2URL=https://upverter.com/datasheet/23dc4ffb028d868909e80577610284b194f13213.pdf, Device Class L1="Circuit Protection", Device Class L2="ESD and Circuit Protection ICs", Device Class L3=unset, Digikey Description="TVS DIODE 5.25V 17V SOT23-6", Direction=Unidirectional, Height=1.45mm, Interface=USB,Ethernet,Other, Lead Free=Yes, Manufacturer Part Number=USBLC6-4SC6, Mouser Description="USBLC6 Series 4 Line 6 V Uni / Bi-Directional ESD Protection - SOT-23-6", Number Of Channels=4, Octopart=https://octopart.com/usblc6-4sc6-stmicroelectronics-347147, RoHS=TRUE, Standoff Height=0mm, Temperature Range High=+125°C
DS1: library part CMP-007-00006-2, "Green LED, 80 mW, 20 mA, -25 to 85 degC, 2-Pin THD", Manufacturer="Shenzhen CGX", Package Description="2-Pin Through Hole Device, Dia 3 mm, Pitch 2.28 mm", Case/Package=304090040, Datasheet URL=http://datasheet.octopart.com/304090040-Chengguangxing-datasheet-62330655.pdf, Datasheet Version="Rev. 1.0, 09/2014", Manufacturer URL=http://szcgx.com/, Mounting Technology=TH, Package Reference=304090040, RoHS Compliant=Unknown
J1: library part CMP-002-00267-1, "USB-C (USB TYPE-C) USB 2.0 Receptacle Connector 24 (16+8 Dummy) Position Surface Mount, Right Angle; Through Hole", Case/Package=None, Check_prices=https://www.snapeda.com/parts/USB4105GFA060/Global+Connector+Technology/view-part/?ref=eda, Component Type=Standard, Design Item ID=USB4105GFA060, MF="Global Connector Technology", MP=USB4105GFA060, Pins=16, SnapEDA_Link=https://www.snapeda.com/parts/USB4105GFA060/Global+Connector+Technology/view-part/?ref=snap, Source=USB4105GFA060.SchLib
J2: library part CMP-17439-000362-1, "CONN HEADER R/A 5POS 2.5MM", Flammability Rating="UL94 V-0", Insulation Color=Natural, Max Operating Temperature=85°C, Min Operating Temperature=-25°C, Voltage Rating=250V, Connector Type=Header, Contact Finish - Mating=TIN, Contact Material=Brass, Contact Shape=Square, Contact Type="Male Pin", Fastening Type=Detent, Insulation Material=Nylon, Lead Free="Lead Free", Mount="Through Hole", Number of Positions=5, Number of Rows=1, Packaging=Bulk, Pitch=2.5mm, Series=XH, Termination=Press-Fit
J3: library part CMP-05380-000001-1, "CONN IC DIP SOCKET ZIF 20POS GLD", Current Rating=1A, Manufacturer=3M, Package=0, Socket Package=DIP20, Temperature="-55°C to +125°C", Temperature Range High=+125°C, Temperature Range Low=-55°C, Automotive=No, Category=Conn, ComponentLink2Description=Datasheet, ComponentLink2URL=https://multimedia.3m.com/mws/media/494546O/3mtm-dip-sockets-100-2-54-mm-ts0365.pdf, Conn Gender=Female, Conn Orientation=Vertical, Contact Material=Gold,Nickel, Device Class L1=Connectors, Device Class L2="IC and Component Sockets", Device Class L3=unset, Digikey Description="CONN IC DIP SOCKET ZIF 20POS GLD", Height=24mm, Is Female=yes, Lead Free=Yes, Manufacturer Part Number=220-3342-00-0602J, Mouser Description="IC & Component Sockets 0.100 DIP SOCKET 20 Contact Qty.", Number Of Contacts=20, Number of Rows=2, Octopart=https://octopart.com/220-3342-00-0602j-3m-108647, Pitch=2.54mm, RoHS=TRUE, Standoff Height=0.38mm
R1 R2 R3: library part CMP-009-046115-1, "RES 5.1K OHM 5% 1/10W 0603", Part Number=RC0603JR-105K1L
R4 R12 R13 R14 R15 R16 R18: library part CMP-009-024644-1, "RES 2.49K OHM 1% 1/16W 0402", Part Number=CRCW04022K49FKEDC
R5: library part CMP-009-013079-1, "RES 442 OHM 1% 1/16W 0402", Part Number=RC0402FR-07442RL
R6: library part CMP-009-068802-1, "RES 200 OHM 1% 1/8W 0805", Part Number=RMEF0805FT200R
R7: library part CMP-009-075815-1, "RES 1.69 KOHMS 0.1% 0.4W 1206", Part Number=RQ73C2B1K69BTD
R8: library part CMP-009-026402-1, "RES 4.17K OHM 1% 1/16W 0402", Part Number=RN73R1ETTP4171F50
R9: library part CMP-009-019611-1, "RES 5.56K OHM 0.1% 1/16W 0402", Part Number=TNPW04025K56BEED
R10: library part CMP-009-030843-1, "RES SMD 6.57K OHM 0.1% 1/6W 0603", Part Number=RNCF0603BTE6K57
R11: library part CMP-009-083477-1, "RES SMD 2.55K OHM 0.1% 1/4W 1206", Part Number=RT1206BRD072K55L
R17: library part CMP-009-029247-1, "RES SMD 1.13K OHM 1% 1/16W 0402", Part Number=AF0402FR-071K13L
R19: library part CMP-009-033475-1, "RES SMD 5K OHM 0.1% 0.15W 0603", Part Number=PNM0603E5001BST5
R20 R23: library part CMP-009-026965-1, "RES 10K OHM 0.1% 1/16W 0402", Part Number=RP73PF1E10KBTDF
R21 R22 R24 R25: library part CMP-009-093445-1, "RES 2.2K OHM 10% 1/2W 1210", Part Number=SG732ETTD222K
R26 R27 R28 R29 R30 R33 R34 R35 R36: library part CMP-009-089824-1, "RES 47K OHM 1% 1/4W 1206", Part Number=RC1206FR-0747KP
R31 R32: library part CMP-009-042855-1, "RES SMD 4.7K OHM 1% 1/10W 0603", Part Number=KTR03EZPF4701
U1: library part CMP-0534-00437-1, "Isolated DC / DC Converter, 2.5 KV rms Insulation Rating, Industrial, 16-pin SOIC (RW-16), Tube", Insulation Rating (kVrms)=2.5, Manufacturer="Analog Devices", Max Operating Temp (degreesC)=105, Code_JEDEC=MS-013-AA, ComponentLink1Description="Manufacturer URL", ComponentLink1URL=http://www.analog.com/en/index.html, ComponentLink2Description=Datasheet, ComponentLink2URL=http://www.analog.com/static/imported-files/data_sheets/ADuM5000.pdf, ComponentLink3Description="Package Specification", ComponentLink3URL=http://www.analog.com/static/imported-files/packages/PKG_PDF/SOIC_WIDE%20%28RW%29/RW_16.pdf, ComponentLink4Description="URL Link1", ComponentLink4URL="Reference Circuit:http://www.analog.com/en/interface-isolation/digital-isolators/adum5000/products/product.html#product-recommendations", DatasheetVersion="Rev. B", Mounting Technology="Surface Mount", PackageDescription="16-Pin Standard Small Outline Package, Body 10.3 x 7.5 mm, Pitch 1.27 mm", PackageReference=RW-16, PackageVersion="032707-B, 03/2007", PartNumber=ADUM5000ARWZ
U2: library part CMP-0534-00647-1, "Full/Low Speed USB Digital Isolator, 2 Channels, 5 kV rms, 3.1 to 5.5 V, -40 to 105 degC, 16-Pin SOIC (RW-16), RoHS, Tube", Manufacturer="Analog Devices", Temperature Range="-40 to 105 degC", Voltage Isolation="5 kVrms", CIN="10 pF Typ.", ComponentLink1Description="Manufacturer URL", ComponentLink1URL=http://www.analog.com/en/index.html, ComponentLink2Description=Datasheet, ComponentLink2URL=http://www.analog.com/static/imported-files/data_sheets/ADuM4160.pdf, ComponentLink3Description="Package Specification", ComponentLink3URL=http://www.analog.com/static/imported-files/packages/PKG_PDF/SOIC_WIDE%20(RW)/RW_16.pdf, Data Rate="12 Mbps Max.", DatasheetVersion="Rev. D", IDD@12 Mbps="8 mA Max.", Mounting Technology="Surface Mount", Number Of Channels=2, PackageDescription="16-Pin Small Outline Integrated Circuit, Body 10.3 x 7.5 mm, Pitch 1.27 mm", PackageVersion=Mar-07, Packing=Tube, PartNumber=ADUM4160BRWZ, RoHS=TRUE, VBUS="3.1 to 5.5 V"
U3: library part CMP-04917-000300-1, "IC REG LINEAR 3.3V 300MA SOT23-5", RoHS Compliant=Yes
U4: library part CMP-0511-00012-1, "Single-Chip USB to UART Bridge, 1024 Bytes EEPROM, -40 to 85 degC, 28-pin QFN, Tube", Manufacturer="Silicon Labs", Code_IPC=J-STD-020C, Code_JEDEC=MO-220, ComponentLink1Description="Manufacturer URL", ComponentLink1URL=http://www.silabs.com/, ComponentLink2Description=Datasheet, ComponentLink2URL=http://www.silabs.com/Support%20Documents/TechnicalDocs/CP2102-9.pdf, ComponentLink3Description="Package Specification", ComponentLink3URL=http://www.silabs.com/Support%20Documents/TechnicalDocs/C8051T61x.pdf, DatasheetVersion="Rev. 1.5", EEPROM="1024 Bytes", Internal Oscillator=TRUE, Mounting Technology="Surface Mount", PackageDescription="28-Pin Quad-Flat No-Leads Package, Body 5 x 5 mm, Pitch 0.5 mm", PackageReference=QFN-28, PartNumber=CP2102-GM, Sub-Family="USB Bridges"
U5 U6 U7 U8 U9: library part CMP-0366-00210-1, "Low Voltage Adjustable Precision Shunt Regulator, 39 ppm / degC, 15 mA, 0 to 70 degC, 3-pin TO-92 (LP), Pb-Free (RoHS)", Manufacturer="Texas Instruments", Rating=Catalog, Temp Coeff(Max)(ppm/ degree C)=129, Temp Coeff(Typ)(ppm/ degree C)=39, Code_JEDEC=TO-226, ComponentLink1Description="Manufacturer URL", ComponentLink1URL=http://www.ti.com/, ComponentLink2Description=Datasheet, ComponentLink2URL=http://www.ti.com/general/docs/lit/getliterature.tsp?genericPartNumber=TLV431&fileType=pdf, ComponentLink3Description="Package Specification", ComponentLink3URL=http://www.ti.com/litv/pdf/msot002a, DatasheetVersion=SLVS139T, Eco-Plan="Green (RoHS & no Sb/Br)", Initial Accuracy @ 25/deg C(%)=1.5, Iout/Iz(Max)(mA)=15, Min Iz for Regulation(uA)=80, Mounting Technology="Through Hole", PackageDescription="Plastic Cylindrical Package, Formed Lead Option (TO-92)", PackageReference=LP3, PackageVersion=4040001-2/C, PartNumber=TLV431CLPE3, SubFamily="Shunt Voltage Reference", VO Adj(Max)(V)=6, VO Adj(Min)(V)=1.24
U10: library part CMP-031-00033-1, "Mainstream Arm Cortex-M0+ MCU with 128 Kbytes of Flash memory, 24 Kbytes RAM, 48 MHz CPU, 2x USART, timers, ADC, comm. I/F, USB FS, 2-3.6V", Manufacturer_Name=STMicroelectronics, Component Type=Standard, Copyright="Copyright (C) 2025 Ultra Librarian. All rights reserved.", Design Item ID=STM32C071RBT6, Manufacturer_Part_Number=STM32C071RBT6, Pins=64, RefDes=RefDes, Source=STM32C071RBT6.SchLib, Type=Type
U11 U12: library part CMP-011-00018-1, "I2C CMOS 8 X 12 Analog Switch Array with Dual/Single Supplies", Manufacturer_Name="Analog Devices Inc", Component Type=Standard, Copyright="Copyright (C) 2025 Ultra Librarian. All rights reserved.", Design Item ID=ADG2128BCPZ-REEL7, Manufacturer_Part_Number=ADG2128BCPZ-REEL7, Pins=33, RefDes=RefDes, Source=ADG2128BCPZ-REEL7.SchLib, Type=Type
U13 U16 U17: library part CMP-0798-00195-1, "1.8 to 5.5 V / +/-2.5 V, CMOS Low Voltage 3 Ohm, 8-Channel Multiplexer, -40 to 125 degC, 16-pin SOP (RU-16), Reel", Manufacturer="Analog Devices", Bandwidth (Hz)=55M, Code_JEDEC=MO-153AB, ComponentLink1Description="Manufacturer URL", ComponentLink1URL=http://www.analog.com/en/index.html, ComponentLink2Description=Datasheet, ComponentLink2URL=http://www.analog.com/static/imported-files/data_sheets/ADG708_709.pdf, ComponentLink3Description="Package Specification", ComponentLink3URL=http:/www.analog.com/static/imported-files/packages/36244347913743854010197452789RU16.pdf, DatasheetVersion="Rev. C", Max Analog Signal Range="Vss to Vdd", Mounting Technology="Surface Mount", PackageDescription="16-Pin Thin Shrink Small Outline Package, Body 5 x 4.4 mm, Pitch 0.65 mm", PackageReference=RU-16, PackageVersion=Nov-02, Packing=Reel, PartNumber=ADG708BRUZ-REEL, Ron (ohms)=3, Supply V Guar Performance="Dual_(+/-2.5V), Single_(+3V), Single_(+5V)", t transition (s)=14n
U14: library part CMP-0798-00149-1, "1.8 to 5.5 V / +/-2.5 V, CMOS Low Voltage 3 Ohm, 4-Channel Multiplexer, -40 to 125 degC, 16-pin SOP (RU-16), Reel", Manufacturer="Analog Devices", Bandwidth (Hz)=55M, Code_JEDEC=MO-153AB, ComponentLink1Description="Manufacturer URL", ComponentLink1URL=http://www.analog.com/en/index.html, ComponentLink2Description=Datasheet, ComponentLink2URL=http://www.analog.com/static/imported-files/data_sheets/ADG708_709.pdf, ComponentLink3Description="Package Specification", ComponentLink3URL=http:/www.analog.com/static/imported-files/packages/36244347913743854010197452789RU16.pdf, DatasheetVersion="Rev. C", Max Analog Signal Range="Vss to Vdd", Mounting Technology="Surface Mount", PackageDescription="16-Pin Thin Shrink Small Outline Package, Body 5 x 4.4 mm, Pitch 0.65 mm", PackageReference=RU-16, PackageVersion=Nov-02, Packing=Reel, PartNumber=ADG709BRUZ-REEL, Ron (ohms)=3, Supply V Guar Performance="Dual_(+/-2.5V), Single_(+3V), Single_(+5V)", t transition (s)=14n
U15: library part CMP-00256-1, "24 Bit Analog to Digital Converter 2 Input 1 Sigma-Delta 16-PDIP", Package=Package, Check_prices=https://www.snapeda.com/parts/NAU7802KGI/Nuvoton/view-part/?ref=eda, Component Type=Standard, Design Item ID=NAU7802KGI, MF="Nuvoton Technology Corporation of America", MP=NAU7802KGI, Pin Count=16, SnapEDA_Link=https://www.snapeda.com/parts/NAU7802KGI/Nuvoton/view-part/?ref=snap, Source=NAU7802KGI.SchLib
Y1: library part CMP-27762-006050-1, "Crystal 24MHz ±10ppm 10pF SMD-4 5mm x 3.2mm", Case/Package=CSMD, ESR (Equivalent Series Resistance)=50R, Frequency=24MHz, Frequency Stability=10ppm, Load Capacitance=10pF, Max Operating Temperature=60°C, Min Operating Temperature=-10°C, Operating Frequency="24 MHz", Package Quantity=1000, Resistor Type=Ceramic, Depth=3.2mm, Frequency Tolerance=10ppm, Height=0.043inch, Lead Free="Lead Free", Length=5mm, Mount="Surface Mount", Number of Pins=4, Packaging="Tape and Reel", Radiation Hardening=No, REACH SVHC="No SVHC", RoHS Compliant=Yes, Series=ABM3B, Termination=SMD/SMT, Tolerance=10ppm, Width=0.126inch

## Via types
v1: diameter 1.27, hole 0.711, Top Layer to Bottom Layer, 11 vias
v2: diameter 0.5, hole 0.2, Top Layer to Bottom Layer, 9 vias

## Nets (pads, with @x,y where several pads share a name; then routed paths per layer and width w, separated by ;. In a path a pad name is that pad's centre, name@x,y a point inside that pad or via, vN(x,y) a via of type N, cw(c..) or ccw(c..) an arc to the next point about the centre after c; other vN are vias at no path point)
2X0: J3.11 U12.3 U16.10 | length 24.4
  Top Layer w0.254: J3.11 113.03,62.23 121.838,71.038 121.838,71.815 121.689,71.964 U16.10
2X1: J3.12 U12.4 U16.9 | length 19.8
  Top Layer w0.254: J3.12 114.3,64.77 120.304,70.774 U16.9
2X2: J3.13 U12.5 U16.7 | length 13
  Top Layer w0.254: J3.13 106.045,67.31 110.699,71.964 U16.7
2X3: J3.14 U12.6 U16.6 | length 12.2
  Top Layer w0.254: J3.14 106.269,72.614 U16.6
2X4: J3.15 U12.7 U16.5 | length 11.4
  Top Layer w0.254: J3.15 104.379,73.264 U16.5
2X5: J3.16 U12.8 U16.4 | length 11.5
  Top Layer w0.254: J3.16 104.521,73.914 U16.4
2X7: J3.18 U12.18 U17.6 | length 9.1
  Top Layer w0.254: J3.18 107.95,80.01 109.769,81.829 U17.6
2X8: J3.19 U12.19 U17.5 | length 8.3
  Top Layer w0.254: J3.19 103.558,82.497 111.788,82.497 U17.5
2X9: J3.20 U12.20 U17.4 | length 9.1
  Top Layer w0.254: J3.20 105.466,83.129 U17.4
2Y0: C16.2 R12.2 R17.2 U9.3 U11.9 U12.9 | length 11.1
  Top Layer w0.254: R12.2@143.51,114.794 143.651,114.935 U9.3 150.495,114.935 151.511,113.919 C16.2 151.561,113.303 151.782,113.524 153.416,113.524
2Y1: C12.2 R4.1 R11.2 U5.3 U11.10 U12.10 | length 13.6
  Top Layer w0.254: 143.764,56.261 U5.3 151.607,56.261 153.493,54.375 C12.2 156.29,54.375 156.464,54.201
2Y2: C13.2 R7.1 R8.2 U7.3 U11.11 U12.11 | length 12.6
  Top Layer w0.254: 143.51,98.665 145.02,98.665 145.669,99.314 U7.3 150.445,99.314 152.223,97.536 C13.2 154.926,97.536 155.067,97.395
2Y3: C14.2 R6.2 R9.2 U6.3 U11.12 U12.12 | length 12.7
  Top Layer w0.254: R6.2 144.032,70.612 U6.3 151.607,70.612 152.985,69.234 154.039,69.234 154.326,68.947 155.829,68.947
2Y4: C15.2 R5.1 R10.2 U8.3 U11.13 U12.13 | length 12.8
  Top Layer w0.254: 143.764,84.822 143.905,84.963 U8.3 150.972,84.963 152.604,83.331 153.588,83.331 154.143,82.776 155.575,82.776
2Y5: C6.2 C8.2 C24.2 C25.2 C32.2 C33.2 C36.1 C38.2 C40.1 C43.1 C44.1 D3.2 R4.2 R6.1 R7.2 R12.1 U2.12 U2.13 U2.14 U2.16 U3.1 U3.3 U4.7 U4.8 U11.14 U11.24 U12.14 U12.24 U13.13 U14.14 U15.15 U16.13 U17.13 | length 14.1
  Top Layer w0.254: C6.2 50.809,68.208 52.763,68.208 U3.1 ; U14.14 106.766,46.441 107.696,47.371 C40.1 ; U17.13 117.574,83.147 118.326,83.147 119.253,84.074 ; U16.13 124.841,73.914 C43.1
2Y6: U10.36 U11.15 U12.15
AVDD: C34.2 C35.2 U15.1 U15.16
DATA_N: U2.6 U4.5
DATA_P: U2.7 U4.4
DN1: D5.4 J1.A7 J1.B7 U2.10 | length 10
  Top Layer w0.152: J1.A7 32.825,77.612 32.845,77.632 34.636,77.632
  Top Layer w0.254: 32.822,78.109 36.064,78.109 37.592,76.581 38.84,76.581 39.263,77.004 39.263,77.678 D5.4
DP1: D5.3 J1.A6 J1.B6 U2.11 | length 1.8
  Top Layer w0.152: J1.B6 34.628,77.132
NetC1_2: C1.2 C2.2 U1.10 | length 5.3
  Top Layer w0.254: U1.10 59.09,80.296 62.197,80.296 C2.2 63.593,80.329 64.008,79.914 C1.2@64.135,79.914
NetC9_2: C9.2 U3.4
NetC19_2: C19.2 J2.5 U10.12
NetC37_2: C37.2 U13.3 | length 3.8
  Top Layer w0.254: C37.2 78.613,81.788 78.699,81.874 U13.3
NetC39_2: C39.2 U14.3 | length 4.6
  Top Layer w0.254: C39.2 95.504,48.006 95.504,46.885 95.948,46.441 U14.3
NetC41_2: C41.2 U16.3 | length 4
  Top Layer w0.254: C41.2 112.413,75.311 113.16,74.564 U16.3
NetDS1_1: DS1.1 R1.1 | length 6.1
  Top Layer w0.254: DS1.1 26.927,102.492 29.21,104.775 R1.1
NetJ1_A5: J1.A5 R3.2 | length 9.9
  Top Layer w0.254: 32.822,79.609 32.842,79.629 35.687,79.629 35.687,82.042 37.045,83.4 39.751,83.4
NetJ1_B5: J1.B5 R2.2 | length 6.2
  Top Layer w0.254: 32.822,76.609 33.586,76.609 34.669,75.526 R2.2
NetJ2_2: J2.2 U10.45
NetJ2_4: J2.4 R19.2 U10.46
NetJ3_17: J3.17 U12.17 U17.7 | length 9.8
  Top Layer w0.254: J3.17 106.807,77.47 110.516,81.179 U17.7
NetR8_1: R8.1 R14.2 U7.1
NetR9_1: R9.1 R15.2 U6.1 | length 13.7
  Top Layer w0.254: 148.971,94.234 148.971,91.059 149.366,90.664 153.888,90.664 154.037,90.813 154.037,91.948 154.037,92.048 155.067,93.078 R9.1@155.067,95.645
NetR10_1: R10.1 R16.2 U8.1 | length 13.3
  Top Layer w0.254: 149.733,65.532 149.733,62.865 150.622,61.976 154.283,61.976 155.053,62.746 155.053,63.627 ; 155.053,63.727 155.829,64.503 R10.1@155.829,67.197
NetR11_1: R11.1 R13.2 U5.1 | length 23.6
  Top Layer w0.254: 149.479,79.883 149.479,77.343 150.114,76.708 153.67,76.708 154.178,77.216 154.178,78.232 ; U5.1 150.114,49.022 151.003,48.133 153.897,48.133 155.321,49.557 R13.2@155.321,49.657 ; 154.178,78.332 155.575,79.729 155.575,81.026 ; R13.2@155.321,49.757 156.464,50.9 156.464,52.451
NetR17_1: R17.1 R18.2 U9.1 | length 11.6
  Top Layer w0.254: U9.1 148.336,107.95 148.971,107.315 153.267,107.315 153.416,107.464 153.416,108.712 153.416,111.774
NetR20_1: R20.1 U11.31
NetR21_1: R21.1 R24.1 U10.60 U11.27 U12.27
NetR22_1: R22.1 R25.1 U10.61 U11.26 U12.26
NetR23_2: R23.2 U12.31
NetU10_18: U10.18 U13.1 U16.1 U17.1
NetU10_19: U10.19 U13.16 U16.16 U17.16
NetU10_20: U10.20 U13.15 U16.15 U17.15
NetU10_21: U10.21 U14.1
NetU10_22: U10.22 U14.16
NetU13_8: U13.8 U14.4 | length 44.4
  Top Layer w0.254: v1(81.895,76.093) 81.895,78.58 81.939,78.624 U13.8 ; v1(92.71,48.387) 95.306,45.791 U14.4
  Bottom Layer w0.254: v1(81.895,76.093) 81.895,70.836 81.153,70.094 81.153,55.88 88.646,48.387 v1(92.71,48.387)
OSC_IN: C17.2 U10.10 U15.10 Y1.1
OSC_OUT: C18.2 U10.11 U15.11 Y1.3